# EAGLE board swimate_display (EAGLE 6.5.0)
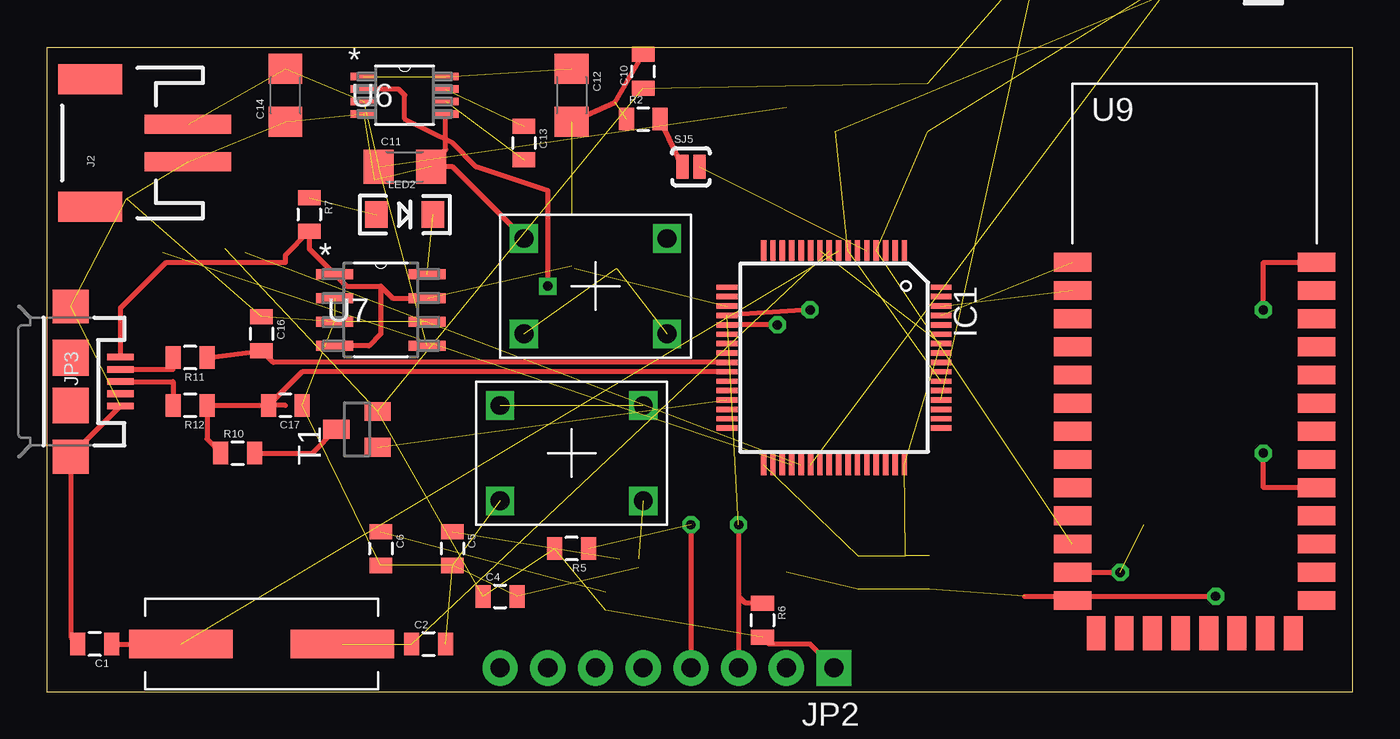
[diagram p0: board, top side]
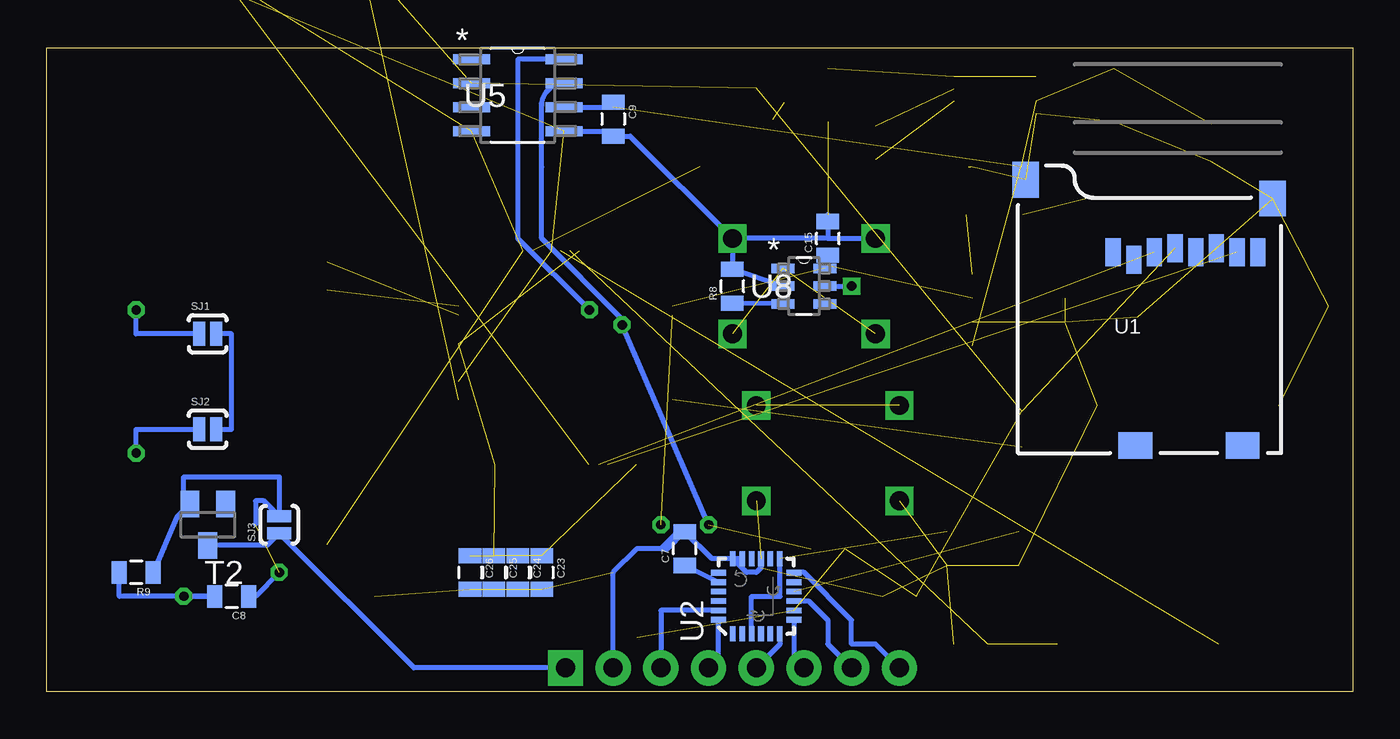
[diagram p1: board, bottom side, seen from below]

Size 69.52 x 34.28 mm. Coordinates in mm from the lower left corner, seen from the top.
Outline: 0,0 69.52,0 69.52,34.28 0,34.28 0,0
Copper layers (1*16): Top 0.035mm / dielectric 1.5mm / Bottom 0.035mm
Design rules "default": minimum track width 10mil, minimum drill 24mil, track to track 8mil, track to pad 8mil, pad to pad 8mil, via to via 8mil, smd to smd 8mil, copper to edge 40mil, drill to drill 8mil, minimum pad ring 10mil, minimum via ring 8mil, stop-mask expansion 4mil, vias tented up to drill 0mil, thermal gap 10mil

## Footprints (pad centres in the part's own frame; a part is rotated, then mirrored left to right if it is on the bottom)
0805 = smd 0.8 x 1.2: 1 -0.9,0; 2 0.9,0
1206 = smd 1.6 x 1.8: 1 -1.4,0; 2 1.4,0
MBED-ICS_LQFP64 = smd 1.1 x 0.285: 1 -5.7,3.75; 2 -5.7,3.25; 3 -5.7,2.75; 4 -5.7,2.25; 5 -5.7,1.75; 6 -5.7,1.25; 7 -5.7,0.75; 8 -5.7,0.25; 9 -5.7,-0.25; 10 -5.7,-0.75; 11 -5.7,-1.25; 12 -5.7,-1.75; 13 -5.7,-2.25; 14 -5.7,-2.75; 15 -5.7,-3.25; 16 -5.7,-3.75; 33 5.7,-3.75; 34 5.7,-3.25; 35 5.7,-2.75; 36 5.7,-2.25; 37 5.7,-1.75; 38 5.7,-1.25; 39 5.7,-0.75; 40 5.7,-0.25; 41 5.7,0.25; 42 5.7,0.75; 43 5.7,1.25; 44 5.7,1.75; 45 5.7,2.25; 46 5.7,2.75; 47 5.7,3.25; 48 5.7,3.75 | smd 0.285 x 1.1: 17 -3.75,-5.7; 18 -3.25,-5.7; 19 -2.75,-5.7; 20 -2.25,-5.7; 21 -1.75,-5.7; 22 -1.25,-5.7; 23 -0.75,-5.7; 24 -0.25,-5.7; 25 0.25,-5.7; 26 0.75,-5.7; 27 1.25,-5.7; 28 1.75,-5.7; 29 2.25,-5.7; 30 2.75,-5.7; 31 3.25,-5.7; 32 3.75,-5.7; 49 3.75,5.7; 50 3.25,5.7; 51 2.75,5.7; 52 2.25,5.7; 53 1.75,5.7; 54 1.25,5.7; 55 0.75,5.7; 56 0.25,5.7; 57 -0.25,5.7; 58 -0.75,5.7; 59 -1.25,5.7; 60 -1.75,5.7; 61 -2.25,5.7; 62 -2.75,5.7; 63 -3.25,5.7; 64 -3.75,5.7
JST-2-SMD = smd 1 x 4.6: 1 -1,-3.7; 2 1,-3.7 | smd 1.6 x 3.4: NC1 -3.4,1.5; NC2 3.4,1.5
1X08_PIN1_NO_SILK = drill 1.016 pad 1.88 square: 1 0,0 | drill 1.016 pad 1.88: 2 2.54,0; 3 5.08,0; 4 7.62,0; 5 10.16,0; 6 12.7,0; 7 15.24,0; 8 17.78,0
USB-MICROB = smd 0.35 x 1.4: D+ 0,2.65; D- -0.65,2.65; GND 1.3,2.65; ID 0.65,2.65; VBUS -1.3,2.65 | smd 1.8 x 1.9: MT1 -4,0; MT2 4,0 | smd 1.9 x 1.9: P$1 -1.27,0; P$2 1.27,0
2X05_1.27MM_SMT = smd 0.65 x 2.6: 1 -2.54,-1.85; 2 -2.54,1.85; 3 -1.27,-1.85; 4 -1.27,1.85; 5 0,-1.85; 6 0,1.85; 7 1.27,-1.85; 8 1.27,1.85; 9 2.54,-1.85; 10 2.54,1.85
LED-1206 = smd 1.2 x 1.4: A -1.5,0; C 1.5,0
SJ_2S-NO = smd 0.635 x 1.27: 1 -0.45,0; 2 0.45,0
KSA_SEALED_TAC_SWITCH = drill 1 square: P$1 -3.81,2.54; P$2 3.81,2.54; P$3 -3.81,-2.54; P$4 3.81,-2.54
SOT23 = smd 1 x 1.4: 1 -0.95,-1.1; 2 0.95,-1.1; 3 0,1.1
MICRO-SD-SOCKET-PP = smd 0.8 x 1.5: 1 -8.94,10.7; 2 -7.84,10.3; 3 -6.74,10.7; 4 -5.64,10.9; 5 -4.54,10.7; 6 -3.44,10.9; 7 -2.34,10.7; 8 -1.24,10.7 | smd 1.8 x 1.4: CD1 -2.05,0.4; CD2 -7.75,0.4 | smd 1.4 x 1.9: GND1 -13.6,14.55; GND3 -0.45,13.55
QFN-24-NP = smd 0.8 x 0.3: 1 -2,1.25; 2 -2,0.75; 3 -2,0.25; 4 -2,-0.25; 5 -2,-0.75; 6 -2,-1.25; 13 2,-1.25; 14 2,-0.75; 15 2,-0.25; 16 2,0.25; 17 2,0.75; 18 2,1.25 | smd 0.3 x 0.8: 7 -1.25,-2; 8 -0.75,-2; 9 -0.25,-2; 10 0.25,-2; 11 0.75,-2; 12 1.25,-2; 19 1.25,2; 20 0.75,2; 21 0.25,2; 22 -0.25,2; 23 -0.75,2; 24 -1.25,2
21-0041B_8 = smd 1.981 x 0.533: 1 -2.464,1.905; 2 -2.464,0.635; 3 -2.464,-0.635; 4 -2.464,-1.905; 5 2.464,-1.905; 6 2.464,-0.635; 7 2.464,0.635; 8 2.464,1.905
21-0036K = smd 1.372 x 0.406: 1 -2.184,0.991; 2 -2.184,0.33; 3 -2.184,-0.33; 4 -2.184,-0.991; 5 2.184,-0.991; 6 2.184,-0.33; 7 2.184,0.33; 8 2.184,0.991
21-0114C = smd 1.219 x 0.508: 1 -1.118,0.94; 2 -1.118,0; 3 -1.118,-0.94; 4 1.118,-0.94; 5 1.118,0; 6 1.118,0.94
BLUETOOTH_SMD = smd 2 x 1: 1 -6.35,3.81; 2 -6.35,2.31; 3 -6.35,0.81; 4 -6.35,-0.69; 5 -6.35,-2.19; 6 -6.35,-3.69; 7 -6.35,-5.19; 8 -6.35,-6.69; 9 -6.35,-8.19; 10 -6.35,-9.69; 11 -6.35,-11.19; 12 -6.35,-12.69; 13 -6.35,-14.19; 22 6.65,-14.19; 23 6.65,-12.69; 24 6.65,-11.19; 25 6.65,-9.69; 26 6.65,-8.19; 27 6.65,-6.69; 28 6.65,-5.19; 29 6.65,-3.69; 30 6.65,-2.19; 31 6.65,-0.69; 32 6.65,0.81; 33 6.65,2.31; 34 6.65,3.81 | smd 1 x 1.8: 14 -5.1,-15.94; 15 -3.6,-15.94; 16 -2.1,-15.94; 17 -0.6,-15.94; 18 0.9,-15.94; 19 2.4,-15.94; 20 3.9,-15.94; 21 5.4,-15.94
CRYSTAL-SMD-10.5X4.8-2PIN = smd 5.5 x 1.5: P$1 -4.3,0; P$2 4.3,0

## Placement (x,y rotation side)
C1  18pF  [0805]  2.54,2.54 180 top
C2  18pF  [0805]  20.32,2.54 0 top
C4  10nF  [0805]  24.13,5.08 0 top
C5  0.1uF  [0805]  21.59,7.62 270 top
C6  0.1uF  [0805]  17.78,7.62 270 top
C7  2.2nF  [0805]  35.56,7.62 90 bottom
C8  0.1uF  [0805]  59.69,5.08 180 bottom
C9  0.1uF  [0805]  39.37,30.48 270 bottom
C10  0.1uF  [0805]  31.75,33.02 90 top
C11  1uF  [1206]  19.05,27.94 0 top
C12  1uF  [1206]  27.94,31.75 270 top
C13  .22uF  [0805]  25.4,29.21 270 top
C14  4u7  [1206]  12.7,31.75 90 top
C15  0.1uF  [0805]  27.94,24.13 90 bottom
C16  18pF  [0805]  11.43,19.05 270 top
C17  18pF  [0805]  12.7,15.24 180 top
C23  10uF  [0805]  43.18,6.35 270 bottom
C24  10uF  [0805]  44.45,6.35 270 bottom
C25  100nF  [0805]  45.72,6.35 270 bottom
C26  100nF  [0805]  46.99,6.35 270 bottom
IC1  LPC11U24  [MBED-ICS_LQFP64]  41.91,17.78 270 top
J2  [JST-2-SMD]  3.81,29.21 90 top
JP2  [1X08_PIN1_NO_SILK]  41.91,1.27 180 top
JP3  USB-MICROB  [USB-MICROB]  1.27,16.51 270 top
JTAG1  [2X05_1.27MM_SMT]  64.77,40.64 0 top  (outside the outline)
LED2  [LED-1206]  19.05,25.4 0 top
R2  2k  [0805]  31.75,30.48 0 top
R3  24k  [0805]  53.34,40.64 270 bottom  (outside the outline)
R4  24k  [0805]  74.93,39.37 0 top  (outside the outline)
R5  10k  [0805]  27.94,7.62 180 top
R6  10k  [0805]  38.1,3.81 270 top
R7  470  [0805]  13.97,25.4 270 top
R8  24k  [0805]  33.02,21.59 90 bottom
R9  24K  [0805]  64.77,6.35 180 bottom
R10  1k5  [0805]  10.16,12.7 0 top
R11  33  [0805]  7.62,17.78 180 top
R12  33  [0805]  7.62,15.24 180 top
SJ1  SOLDERJUMPERNO  [SJ_2S-NO]  60.96,19.05 0 bottom
SJ2  SOLDERJUMPERNO  [SJ_2S-NO]  60.96,13.97 0 bottom
SJ3  SOLDERJUMPERNO  [SJ_2S-NO]  57.15,8.89 90 bottom
SJ5  SOLDERJUMPERNO  [SJ_2S-NO]  34.29,27.94 0 top
SW_MODE  [KSA_SEALED_TAC_SWITCH]  27.94,12.7 180 top
SW_PWR  [KSA_SEALED_TAC_SWITCH]  29.21,21.59 0 top
T1  BSS84  [SOT23]  16.51,13.97 90 top
T2  BSS84  [SOT23]  60.96,8.89 180 bottom
U1  USD-SOCKETNEW  [MICRO-SD-SOCKET-PP]  3.81,12.7 0 bottom
U2  [QFN-24-NP]  31.75,5.08 90 bottom
U5  DS3231MZ/V+T  [21-0041B_8]  44.45,31.75 0 bottom
U6  MAX1595EUA33+  [21-0036K]  19.05,31.75 0 top
U7  MAX1811ESA-T  [21-0041B_8]  17.78,20.32 0 top
U8  MAX16054AZT+T  [21-0114C]  29.21,21.59 0 bottom
U9  HC_05  [BLUETOOTH_SMD]  60.96,19.05 0 top
Y1  12.000MHz  [CRYSTAL-SMD-10.5X4.8-2PIN]  11.43,2.54 180 top

## Library data of the parts
C1 C2 C4-C10 C13-C17 R2-R12 SJ1-SJ3 SJ5 = SparkFun-Passives
C11 C12 C23-C26 = SparkFun-Capacitors
IC1 T1 T2 = mbed-HDK
J2 = SparkFun-Connectors; PROD_ID: CONN-08352
JP2 U1 = SparkFun-Connectors
JP3 = SparkFun-Connectors; PROD_ID: CONN-09505
JTAG1 = microbuilder
LED2 = SparkFun-LED
SW_MODE SW_PWR = SparkFun-Electromechanical
U2 = SparkFun-Sensors
U5 = maximparts; MANUFACTURER_NAME: Maxim; MANUFACTURER_PART_NUMBER: DS3231MZ/V+T; VENDOR: Maxim
U6 = maximparts; MANUFACTURER_NAME: Maxim; MANUFACTURER_PART_NUMBER: MAX1595EUA33+; VENDOR: Maxim
U7 = maximparts; MANUFACTURER_NAME: Maxim; MANUFACTURER_PART_NUMBER: MAX1811ESA-T; VENDOR: Maxim
U8 = maximparts; MANUFACTURER_NAME: Maxim; MANUFACTURER_PART_NUMBER: MAX16054AZT+T; VENDOR: Maxim
U9 = Bluetooth HC-05
Y1 = SparkFun-FreqCtrl

## Nets
3.3V: C4.1 C10.1 JP2.1 JTAG1.1 R3.2 R5.2 R6.2 SJ3.1 T1.2 T2.3 U1.4 U2.8 U5.2
3V3_ENABLE: U6.2 U8.5
BOOTLOAD: IC1.5 SJ5.2
BT_ENABLE: T2.1
BT_KEY: SJ1.2 SJ2.2
CHARGE_STAT: LED2.C U7.8
GND: C1.2 C2.2 C4.2 C5.2 C6.2 C7.2 C8.2 C9.2 C10.2 C11.2 C12.2 C14.1 C15.2 C16.1 C17.1 C23.2 C24.2 C25.2 C26.2 IC1.7 IC1.54 J2.1 JP2.2 JP3.GND JP3.MT1 JP3.MT2 JTAG1.3 JTAG1.5 JTAG1.7 JTAG1.9 R2.1 R4.1 R8.2 R9.2 SW_MODE.P$1 SW_MODE.P$2 SW_PWR.P$1 SW_PWR.P$2 U1.6 U1.GND1 U1.GND3 U2.15 U2.17 U2.18 U5.5 U6.4 U6.5 U7.2 U7.3 U7.6 U8.2 U9.13
I2C_SCL: IC1.20 JP2.3 R6.1 U2.23 U5.8
I2C_SDA: IC1.21 JP2.4 R5.1 U2.24 U5.7
MCU_RX: IC1.61 U9.1
MCU_TX: IC1.62 U9.2
MPU_AD0: JP2.7 U2.9
MPU_INT: JP2.8 U2.12
MPU_XCL: JP2.6 U2.7
MPU_XDA: JP2.5 U2.6
N$1: SW_PWR.P$3 SW_PWR.P$4 U8.1
N$4: C5.1 U2.3 U2.13
N$5: C6.1 U2.10
N$6: C23.1 C24.1 C25.1 C26.1 IC1.10 IC1.33 IC1.48 IC1.58
N$7: C7.1 U2.20
N$8: LED2.A R7.1
N$9: SJ2.1 U9.26
N$11: SJ1.1 U9.34
N$12: C12.1 U6.1 U6.8
N$13: C13.1 U6.7
N$14: C13.2 U6.6
N$15: C8.1 R9.1 SJ3.2 T2.2 U9.12
N$16: R10.2 T1.3
N$17: C17.2 IC1.26 R10.1 R12.1
N$18: C16.2 IC1.25 R11.1
N$19: JP3.D+ R12.2
N$20: JP3.D- R11.2
N$21: R2.2 SJ5.1
N$23: C1.1 IC1.8 Y1.P$2
N$24: C2.1 IC1.9 Y1.P$1
RST: IC1.4 JTAG1.10 U5.4 U9.11
SD_CS: U1.2
SD_DETECT: U1.CD2
SPI0_MISO: IC1.36 U1.7
SPI0_MOSI: IC1.37 U1.3
SPI0_SCK: U1.5
SPI1_MISO: IC1.35
SPI1_MOSI: IC1.51
SPI1_SCK: IC1.18
SPI_MOSI0: JTAG1.6
SW_MODE: SW_MODE.P$3 SW_MODE.P$4
SWCLK: IC1.38 JTAG1.4 R4.2
SWDIO: IC1.52 JTAG1.2 R3.1
SYS_SHUTDOWN: R8.1 U8.3
USB_SCON: IC1.29 T1.1
VBAT: C9.1 C11.1 C14.2 J2.2 U5.6 U6.3 U7.5
VUSB: C15.1 IC1.19 JP3.VBUS R7.2 U7.1 U7.4 U7.7 U8.6

## Tracks (layer width: path | path; a pad name or v marks a point on that pad's centre or on a via)
3.3V  (9 unrouted)
  Top 0.254: JP2.1 40.64,2.54 38.47,2.54 R6.2
  Bottom 0.254: JP2.1 49.98,1.27 SJ3.1 57.8,7.79 T2.3
3V3_ENABLE  (via drill 0.5)
  Top 0.254: v26.67,21.59 26.67,26.67 22.86,27.94 21.59,29.21 19.05,30.48 19.05,31.75 18.72,32.08 U6.2
  Bottom 0.254: U8.5 v26.67,21.59
BOOTLOAD  (1 unrouted)
BT_KEY
  Bottom 0.254: SJ2.2 59.69,13.97 59.69,19.05 SJ1.2
CHARGE_STAT  (1 unrouted)
GND  (via drill 0.5)  (35 unrouted)
  Top 0.254: 52.07,5.08 54.39,5.08 U9.13 54.83,5.08 v62.23,5.08 | JP3.GND 1.27,12.56 JP3.MT2 1.27,2.91 C1.2 | 47.63,16.51 IC1.54 | C12.2 30.24,31.38 C10.2 | SW_PWR.P$1 21.59,27.94 20.32,27.94 21.23,28.85 U6.5
  Bottom 0.254: JP2.2 39.37,6.35 38.1,7.62 36.83,7.62 | 36.83,7.62 36.46,7.62 C7.2 | U2.15 31.5,6.6 31.75,6.35 32.27,6.35 U2.18 | U2.17 U2.18 | U2.18 34.12,7.08 C7.2 | C7.2 35.93,8.52 36.83,7.62 | v62.23,5.08 C8.2 65.67,5.08 R9.2 | U5.5 39.37,29.84 C9.2 38.47,29.58 SW_PWR.P$2 | 27.94,24.13 SW_PWR.P$1 | U8.2 R8.2 SW_PWR.P$2 | 27.94,25.4 C15.2 27.94,24.13 | 27.94,24.13 SW_PWR.P$2
  other vias: 24.13,10.16
I2C_SCL  (via drill 0.5)  (1 unrouted)
  Top 0.254: v40.64,20.32 IC1.20 | v36.83,8.89 36.83,5.08 | 36.83,5.08 JP2.3 | R6.1 37.2,4.71 36.83,5.08
  Bottom 0.254: U2.23 36.83,4.33 JP2.3 | U5.8 44.45,33.66 44.45,24.13 v40.64,20.32
I2C_SDA  (via drill 0.5)  (1 unrouted)
  Top 0.254: v38.89,19.53 IC1.21 | v34.29,8.89 JP2.4
  Bottom 0.254: JP2.4 33.75,1.81 U2.24 | v34.29,8.89 v38.89,19.53 38.89,19.84 43.18,24.13 43.18,27.94 43.18,31.19 arc90 U5.7
MCU_RX  (1 unrouted)
MCU_TX  (1 unrouted)
MPU_AD0
  Bottom 0.254: U2.9 28.96,4.83 27.94,3.81 27.94,2.54 JP2.7
MPU_INT
  Bottom 0.254: JP2.8 25.4,2.54 26.67,2.54 26.67,3.81 29.21,6.35 29.73,6.35 U2.12
MPU_XCL
  Bottom 0.254: U2.7 29.75,1.81 JP2.6
MPU_XDA
  Bottom 0.254: U2.6 30.5,2.52 JP2.5
N$1  (2 unrouted)
N$2  (via drill 0.5)
  other vias: 57.15,6.35
N$3  (via drill 0.5)
  other vias: 64.77,12.7
N$4  (1 unrouted)
  Bottom 0.254: U2.3 32,5.08 30.48,5.08 30.48,7.08 U2.13
N$5  (1 unrouted)
N$6  (7 unrouted)
N$7
  Bottom 0.254: C7.1 U2.20
N$8  (1 unrouted)
N$9  (via drill 0.5)
  Top 0.254: U9.26 64.77,10.86 v64.77,12.7
  Bottom 0.254: v64.77,12.7 64.77,13.97 SJ2.1
N$10  (via drill 0.5)
  other vias: 64.77,20.32
N$11  (via drill 0.5)
  Top 0.254: v64.77,20.32 64.77,22.86 U9.34
  Bottom 0.254: SJ1.1 64.77,19.05 v64.77,20.32
N$12  (2 unrouted)
N$13  (1 unrouted)
N$14  (1 unrouted)
N$15  (via drill 0.5)  (1 unrouted)
  Top 0.254: U9.12 v57.15,6.35
  Bottom 0.254: R9.1 62.6,9.3 T2.2 62.23,10.31 62.23,11.43 57.15,11.43 SJ3.2 57.97,10.16 58.42,10.16 58.42,8.89 | v57.15,6.35 58.42,5.08 C8.1
N$16
  Top 0.254: R10.2 14.14,12.7 T1.3
N$17
  Top 0.254: C17.2 R12.1 8.52,13.44 R10.1 | 12.7,15.24 C17.2 | IC1.26 13.59,17.03 C17.2
N$18
  Top 0.254: R11.1 C16.2 12.05,17.53 IC1.25
N$19
  Top 0.254: JP3.D+ 6.72,16.51 R12.2
N$20
  Top 0.254: JP3.D- 6.72,17.16 R11.2
N$21
  Top 0.254: SJ5.1 R2.2
N$22  (via drill 0.5)
  other vias: 26.67,21.59
N$23  (1 unrouted)
  Top 0.254: C1.1 Y1.P$2
N$24  (2 unrouted)
RST  (3 unrouted)
SPI0_MISO  (1 unrouted)
SPI0_MOSI  (1 unrouted)
SW_MODE  (1 unrouted)
SWCLK  (2 unrouted)
SWDIO  (2 unrouted)
SYS_SHUTDOWN
  Bottom 0.254: U8.3 R8.1
USB_SCON  (1 unrouted)
VBAT  (5 unrouted)
  Bottom 0.254: U5.6 39.37,31.11 C9.1
VUSB  (2 unrouted)
  Top 0.254: JP3.VBUS 3.92,20.43 6.35,22.86 12.7,22.86 12.7,23.23 R7.2 13.97,23.57 U7.1 15.95,21.59 17.78,21.59 | 17.78,21.59 18.41,20.95 U7.7 | 17.78,21.59 17.78,19.05 17.14,18.41 U7.4
  Bottom 0.254: U8.6 27.94,22.68 C15.1